# Altium PCB WeeMouseRiscPC.PcbDoc
Units mm, origin at the board's own origin, x right, y up, seen from the top; angles counter-clockwise.
Board outline 22.5 x 17.4 mm, 2 copper layers (Top Layer, Bottom Layer), stack 1.671 mm thick; 6 components, 13 nets, 37 pads, 19 vias.
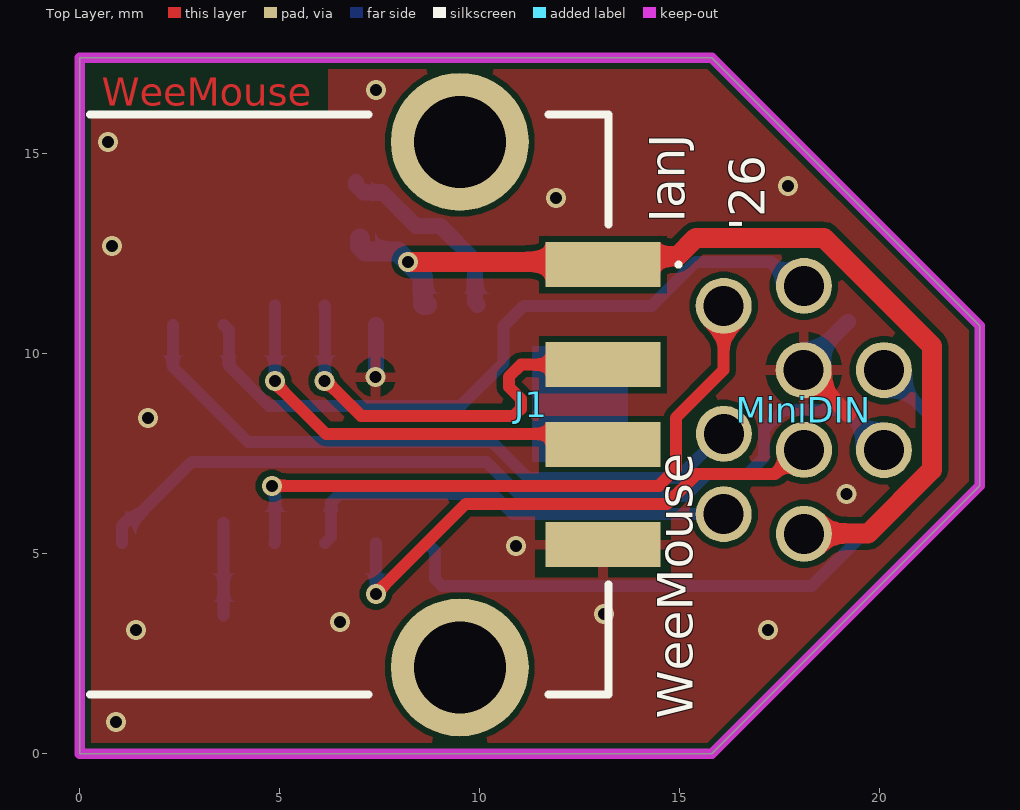
[diagram p0: Top Layer view]
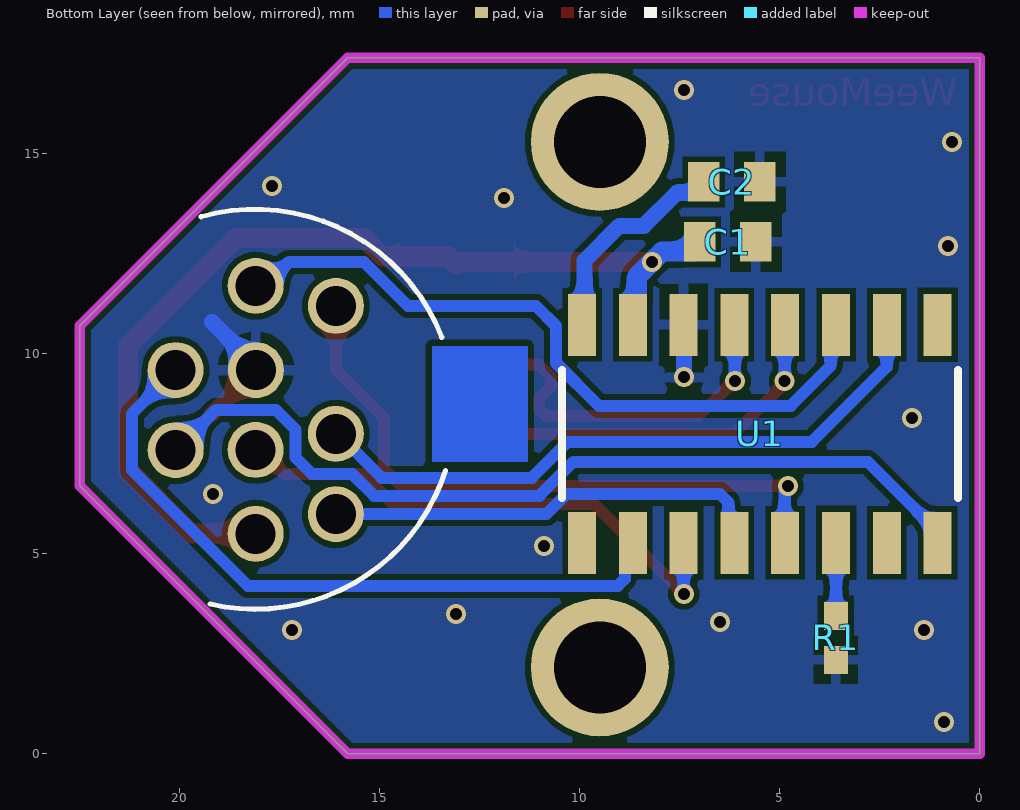
[diagram p1: Bottom Layer view, seen from below]
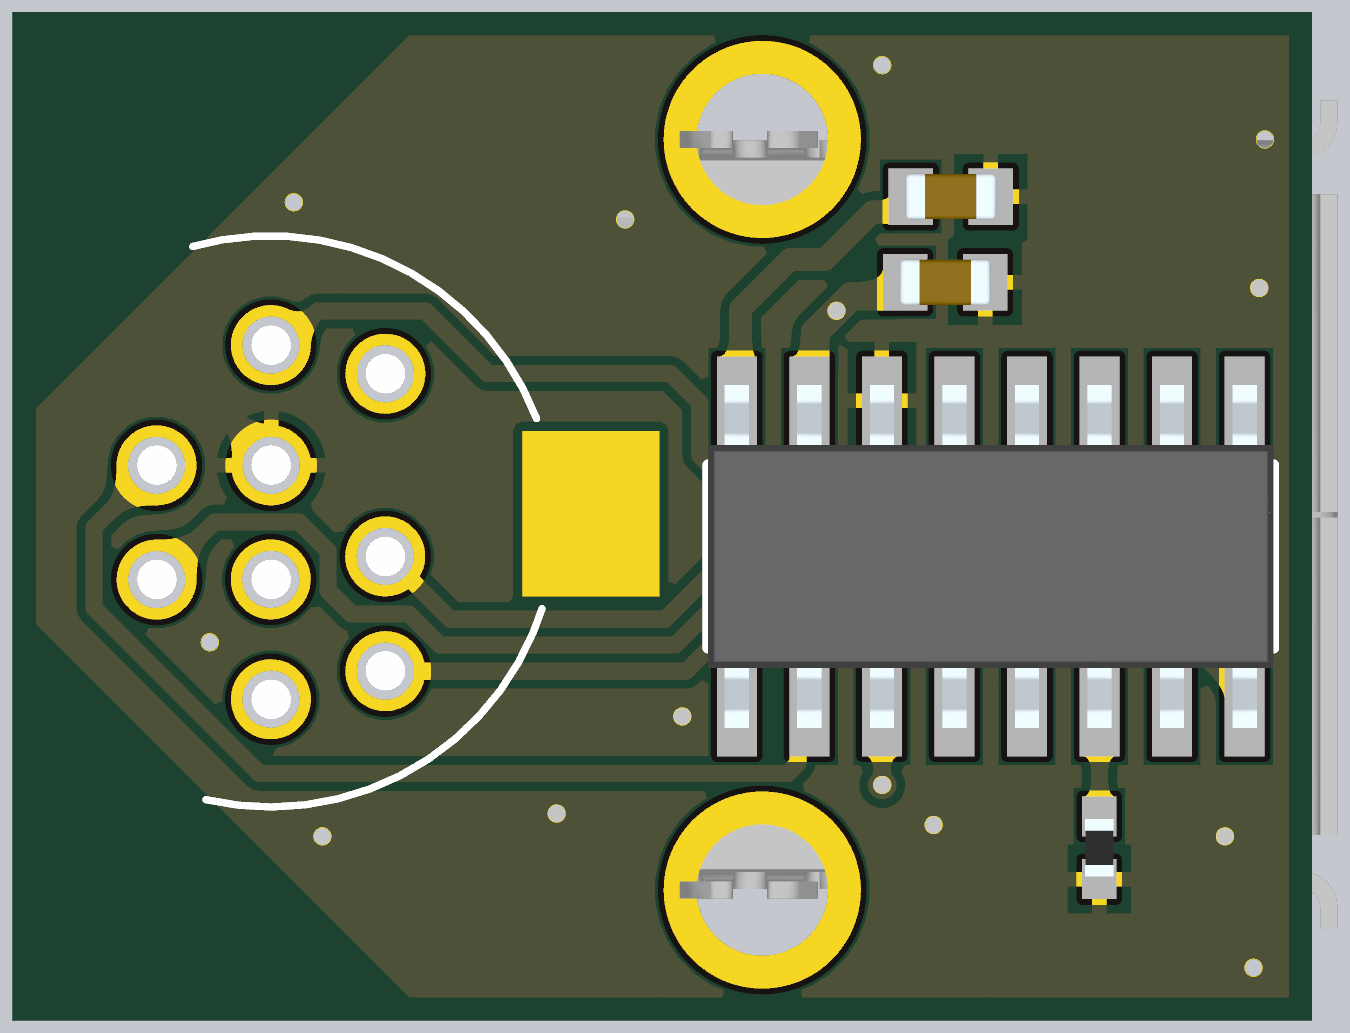
[diagram p2: 3D render of the assembled board from below, using the file's embedded part models]

## Layer stack, top to bottom
Top Solder: solder mask 0.0102, Solder Resist, Dk 3.5
Top Layer: signal copper 0.0356
Dielectric 1: dielectric 0.2, FR-4, Dk 4.8
Dielectric 2: core 1.2, PP-006, Dk 4.1
Dielectric2: dielectric 0.2, FR-4, Dk 4.8
Bottom Layer: signal copper 0.0356
Bottom Solder: solder mask 0.0102, Solder Resist, Dk 3.5

## Board outline
0,0 0,17.4 15.8,17.4 22.5,10.7 22.5,6.7 15.8,0

## Design rules (kind name [scope] priority, off if disabled: settings)
Clearance [All] p1: gap=0.15 ignorepadtopadclearanceinfootprint=FALSE
HoleSize [All] p1: absolutevalues=TRUE maxlimit=5 minlimit=0.025 maxpercent=80.000 minpercent=20.000
MinimumSolderMaskSliver [All] p1: minsoldermaskwidth=0.05
PolygonConnect [All] p1: connectstyle=Relief reliefconductorwidth=0.254 reliefentries=4 polygonreliefangle="90 Angle" airgapwidth=0.254
RoutingVias [All] p1: holewidth=0.711 width=1.27 viastyle="Through Hole" minholewidth=0.711 minwidth=1.27 maxholewidth=0.711 maxwidth=1.27
SilkToSolderMaskClearance [IsPad] p1 off: minsilkscreentomaskgap=0.254 clearancetoexposedcopper=TRUE
SolderMaskExpansion [All] p1: expansion=0.102 istentingtop=FALSE
SupplyNets "Schematic Supply Nets_1" [InNet('GND')] p1: voltage=0.000
SupplyNets "Schematic Supply Nets" [InNet('VCC')] p2: voltage=0.000
Width [All] p1: maxlimit=0.5 minlimit=0.254 preferedwidth=0.254 minimp=50.000000 maximp=50.000000 favimp=50.000000
27 further rules are at their usual default settings.

## Classes and differential pairs
component class WeeMouse: C1 C2 J1 R1 U1

## Components (designator, comment, footprint, x,y, rotation, side; value= is the part's Value field where it differs from the comment)
C1 "100nF 0603" CAPC1608X90N 6.3,12.8 r180 bottom
C2 "100nF 0603" CAPC1608X90N 6.2,14.3 r0 bottom
J1 "87583-2010BLF" 875832010BLF 6.22,8.73 r270 top locked
MiniDIN "Comment" 9pinMiniDinPins 18.1,8.6 r90 top locked
R1 "0402 1K" RESC1005X40N 3.6,2.9 r90 bottom
U1 "CH544G SOIC16" SOIC127P600X175-16N 5.5,8 r90 bottom locked

## Footprints (in the part's own frame and the unit in brackets; to place one, negate y for a bottom-side part, rotate by r counter-clockwise, add the part's x,y. Pads: shape width x height; smd on the part's side, far side on the other; paste and mask are expansions set on the pad)
9pinMiniDinPins [mm]
  round 1.4 hole 1: 1(0.995,-2.004) 2(-1.005,-2.002) 3(3.1,-0.003) 4(0.994,0.002) 5(-1.002,-0.004) 6(-3.1,-0.002) 7(2.599,2.002) 8(-0.599,2) 9(-2.609,2.003)
  body extent -3.45,-2.34 3.45,2.35
875832010BLF [mm]
  rect 1.12x2.88 smd: 1(-3.5,6.86) 2(-1,6.86) 3(1,6.86) 4(3.5,6.86)
  round 3.45 hole 2.3: MH1(-6.57,3.28) MH2(6.57,3.28)
  silkscreen extent -7.25,-5.97 7.25,8.8, body extent -7.25,-6.79 7.25,8.09, height 7.49
CAPC1608X90N [mm]
  rect 0.78x0.99 smd: 1(-0.7,0) 2(0.7,0)
  body extent -0.8,-0.41 0.8,0.41, height 0.9
RESC1005X40N [mm]
  rect 0.7x0.6 smd: 1(-0.55,0) 2(0.55,0)
  body extent -0.5,-0.25 0.5,0.25, height 0.4
SOIC127P600X175-16N [mm]
  rect 1.55x0.7 smd: 1(-2.725,4.445) 2(-2.725,3.175) 3(-2.725,1.905) 4(-2.725,0.635) 5(-2.725,-0.635) 6(-2.725,-1.905) 7(-2.725,-3.175) 8(-2.725,-4.445) 9(2.725,-4.445) 10(2.725,-3.175) 11(2.725,-1.905) 12(2.725,-0.635) 13(2.725,0.635) 14(2.725,1.905) 15(2.725,3.175) 16(2.725,4.445)
  silkscreen extent -1.6,-4.95 1.6,4.95, body extent -3,-4.95 3,4.95, height 1.75

## Part data
C1 C2: library part 06033C104KAT4A, "Capacitor", Manufacturer_Name=AVX, Mouser Part Number=581-06033C104KAT4A, Arrow Part Number=06033C104KAT4A, Arrow Price/Stock=https://www.arrow.com/en/products/06033c104kat4a/avx?region=nac, Datasheet Link=http://www.mouser.com/catalog/supplier/library/pdf/AVXSurfaceMountCeramic.pdf, Height=0.9mm, Manufacturer_Part_Number=06033C104KAT4A, Mouser Price/Stock=https://www.mouser.co.uk/ProductDetail/AVX/06033C104KAT4A?qs=8C2chATdSPiv3E9zfPZulg%3D%3D
J1: "Connector", Manufacturer_Name="Amphenol Communications Solutions", Arrow Part Number=87583-2010BLF, Arrow Price/Stock=https://www.arrow.com/en/products/87583-2010blf/amphenol-fci?region=europe, Datasheet Link=https://cdn.amphenol-cs.com/media/wysiwyg/files/drawing/87583.pdf, Height=7.94mm, Manufacturer_Part_Number=87583-2010BLF
R1: library part CRCW04021K00JNED, "Resistor", LCSC Part #=C279981, Manufacturer_Name=Vishay, Mouser Part Number=71-CRCW0402J-1.0K-E3, Arrow Part Number=CRCW04021K00JNED, Arrow Price/Stock=https://www.arrow.com/en/products/crcw04021k00jned/vishay, Datasheet Link=http://www.vishay.com/docs/20035/dcrcwe3.pdf, Height=0.4mm, Manufacturer_Part_Number=CRCW04021K00JNED, Mouser Price/Stock=https://www.mouser.co.uk/ProductDetail/Vishay-Dale/CRCW04021K00JNED?qs=YX%252BK5oaHNYpGRsHVuzxl1A%3D%3D
U1: library part CH544G, "8051 MCU with USB host", Manufacturer_Name=onsemi, Manufacturer_Part_Number=MM74HC4049M

## Via types
v1: diameter 0.5, hole 0.3, Top Layer to Bottom Layer, tented both sides, 19 vias

## Nets (pads, with @x,y where several pads share a name; then routed paths per layer and width w, separated by ;. In a path a pad name is that pad's centre, name@x,y a point inside that pad or via, vN(x,y) a via of type N, cw(c..) or ccw(c..) an arc to the next point about the centre after c; other vN are vias at no path point)
ButL: MiniDIN.2 U1.8 | length 22.2
  Bottom Layer w0.3: U1.8 1.055,5.7 1.255,5.9 1.401,5.9 2.801,7.3 10.164,7.3 11.014,6.45 15.142,6.45 15.683,6.991 16.691,6.991 17.102,7.402 17.102,8.102 17.6,8.6 19.097,8.6 MiniDIN.2
ButM: MiniDIN.3 U1.11 | length 18.2
  Bottom Layer w0.3: U1.11 3.729,10.591 3.729,9.697 4.726,8.7 9.524,8.7 10.595,9.771 10.595,10.695 11.1,11.2 14.3,11.2 15.4,12.3 17.275,12.3 17.875,11.7 MiniDIN.3
ButR: MiniDIN.8 U1.10 | length 16.4
  Bottom Layer w0.3: U1.10 2.325,9.675 4.2,7.8 10.3,7.8 11.2,6.9 14.956,6.9 16.056,8.001 MiniDIN.8
GND: C1.2 C2.1 J1.4 MiniDIN.4 R1.1 U1.14 | length 4.5
  Top Layer w0.4: MiniDIN.4 19.192,8.5 19.2,8.5
  Bottom Layer w0.4: v1(7.393,9.417) 7.399,9.423 7.399,10.719 U1.14 ; MiniDIN.4 18.098,9.698 19.2,10.8
  other v1: 0.9,0.8 1.4,3.1 17.2,3.1 6.5,3.3 13.1,3.5 10.9,5.2 19.171,6.497 1.7,8.4 0.8,12.7 11.9,13.9 17.7,14.2 0.7,15.3 7.4,16.6
Reset: R1.2 U1.6 | length 2.3
  Bottom Layer w0.3: R1.2@3.595,3.455 U1.6@3.595,5.775
UDM: J1.2 U1.13 | length 10.6
  Top Layer w0.3: v1(6.118,9.322) 6.158,9.322 7.029,8.45 10.85,8.45 11.026,8.626 11.026,8.874 10.724,9.176 10.724,9.424 11.03,9.73 J1.2
  Bottom Layer w0.3: v1(6.118,9.322) 6.126,9.33 6.126,11.199 U1.13@6.118,11.208
UDP: J1.3 U1.12 | length 10.8
  Top Layer w0.3: v1(4.882,9.322) 4.882,9.268 6.15,8 12.81,8 J1.3
  Bottom Layer w0.3: v1(4.882,9.322) 4.874,9.33 4.874,11.199 U1.12@4.882,11.208
V33: C2.2 U1.16 | length 5
  Bottom Layer w0.4: C2.2 6.9,14.223 7.09,14.033 7.567,14.033 8.4,13.2 9.012,13.2 9.879,12.333 9.879,11.291 U1.16@9.945,11.225
VCC: C1.1 J1.1 MiniDIN.6 U1.15 | length 24.4
  Top Layer w0.5: v1(8.2,12.3) 13.01,12.3 J1.1 13.285,12.435 14.935,12.435 15.4,12.9 18.6,12.9 21.3,10.2 21.3,7.1 19.709,5.509 18.11,5.509 MiniDIN.6
  Bottom Layer w0.5: C1.1@7.009,12.879 7,12.871 C1.1 7,12.695 7.14,12.555 7.945,12.555 v1(8.2,12.3) 8.575,11.925 8.575,11.25 8.6,11.225 U1.15@8.675,11.225
X1: MiniDIN.5 U1.3 | length 13.5
  Top Layer w0.3: v1(7.4,4) 9.65,6.25 14.679,6.25 15.42,6.991 17.379,6.991 17.986,7.598 MiniDIN.5
  Bottom Layer w0.3: v1(7.4,4) 7.402,4.002 7.402,5.272 U1.3
X2: MiniDIN.1 U1.2 | length 17.5
  Bottom Layer w0.3: U1.2 8.875,5.075 8.875,4.376 9.051,4.2 18.3,4.2 21.2,7.1 21.2,8.499 MiniDIN.1
Y1: MiniDIN.9 U1.4 | length 11.2
  Bottom Layer w0.3: U1.4 6.286,5.426 6.286,6.286 6.5,6.5 10.327,6.5 10.836,5.991 MiniDIN.9
Y2: MiniDIN.7 U1.5 | length 16.3
  Top Layer w0.3: v1(4.8,6.7) 14.474,6.7 14.9,7.126 14.9,8.4 16.098,9.598 MiniDIN.7
  Bottom Layer w0.3: v1(4.8,6.7) 4.8,6.646 4.882,6.563 4.882,5.292 U1.5
pads on no net: J1.MH1 J1.MH2 U1.1 U1.7 U1.9

## Polygon pours and split planes (outlines as drawn)
GND on Bottom Layer "NONET_L-01_P-001" (solid, remove dead copper, pour order 1): 0.189,0 22.5,0 22.5,17.3 0.137,17.3
GND on Top Layer "NONET_L-01_P-001" (solid, remove dead copper, pour order 0): 0.189,0 22.5,0 22.5,17.3 0.136,17.3

## Keep-outs
Keep-Out Layer:
  the board outline again, w0.254

## Other copper
Top Layer:
  text "WeeMouse" at 0.55,16.207 h0.7
Bottom Layer:
  rectangle: 11.3,7.3 13.7,10.2

## Silkscreen, mask and mechanical layers (free items; w line width, h text height)
Top Overlay:
  text "IanJ" at 15.122,13.278 h0.89 r90
  text "'26" at 17.122,13.078 h0.89 r90
  text "WeeMouse" at 15.322,0.878 h0.89 r90
Bottom Overlay:
  lines w0.127: 13.355,7.086 ccw(c18.116,8.614) 19.24,3.742 ; 13.451,10.414 cw(c18.116,8.614) 19.471,13.427
Bottom Solder:
  rectangle: 11.3,7.3 13.7,10.2
Board Shape:
  the board outline again, w0.254